# Altium PCB PCB1.PcbDoc
Units mm, origin at the board's own origin, x right, y up, seen from the top; angles counter-clockwise.
Board outline 55 x 45 mm, 2 copper layers (Top Layer, Bottom Layer); 64 components, 47 nets, 257 pads, 33 vias.
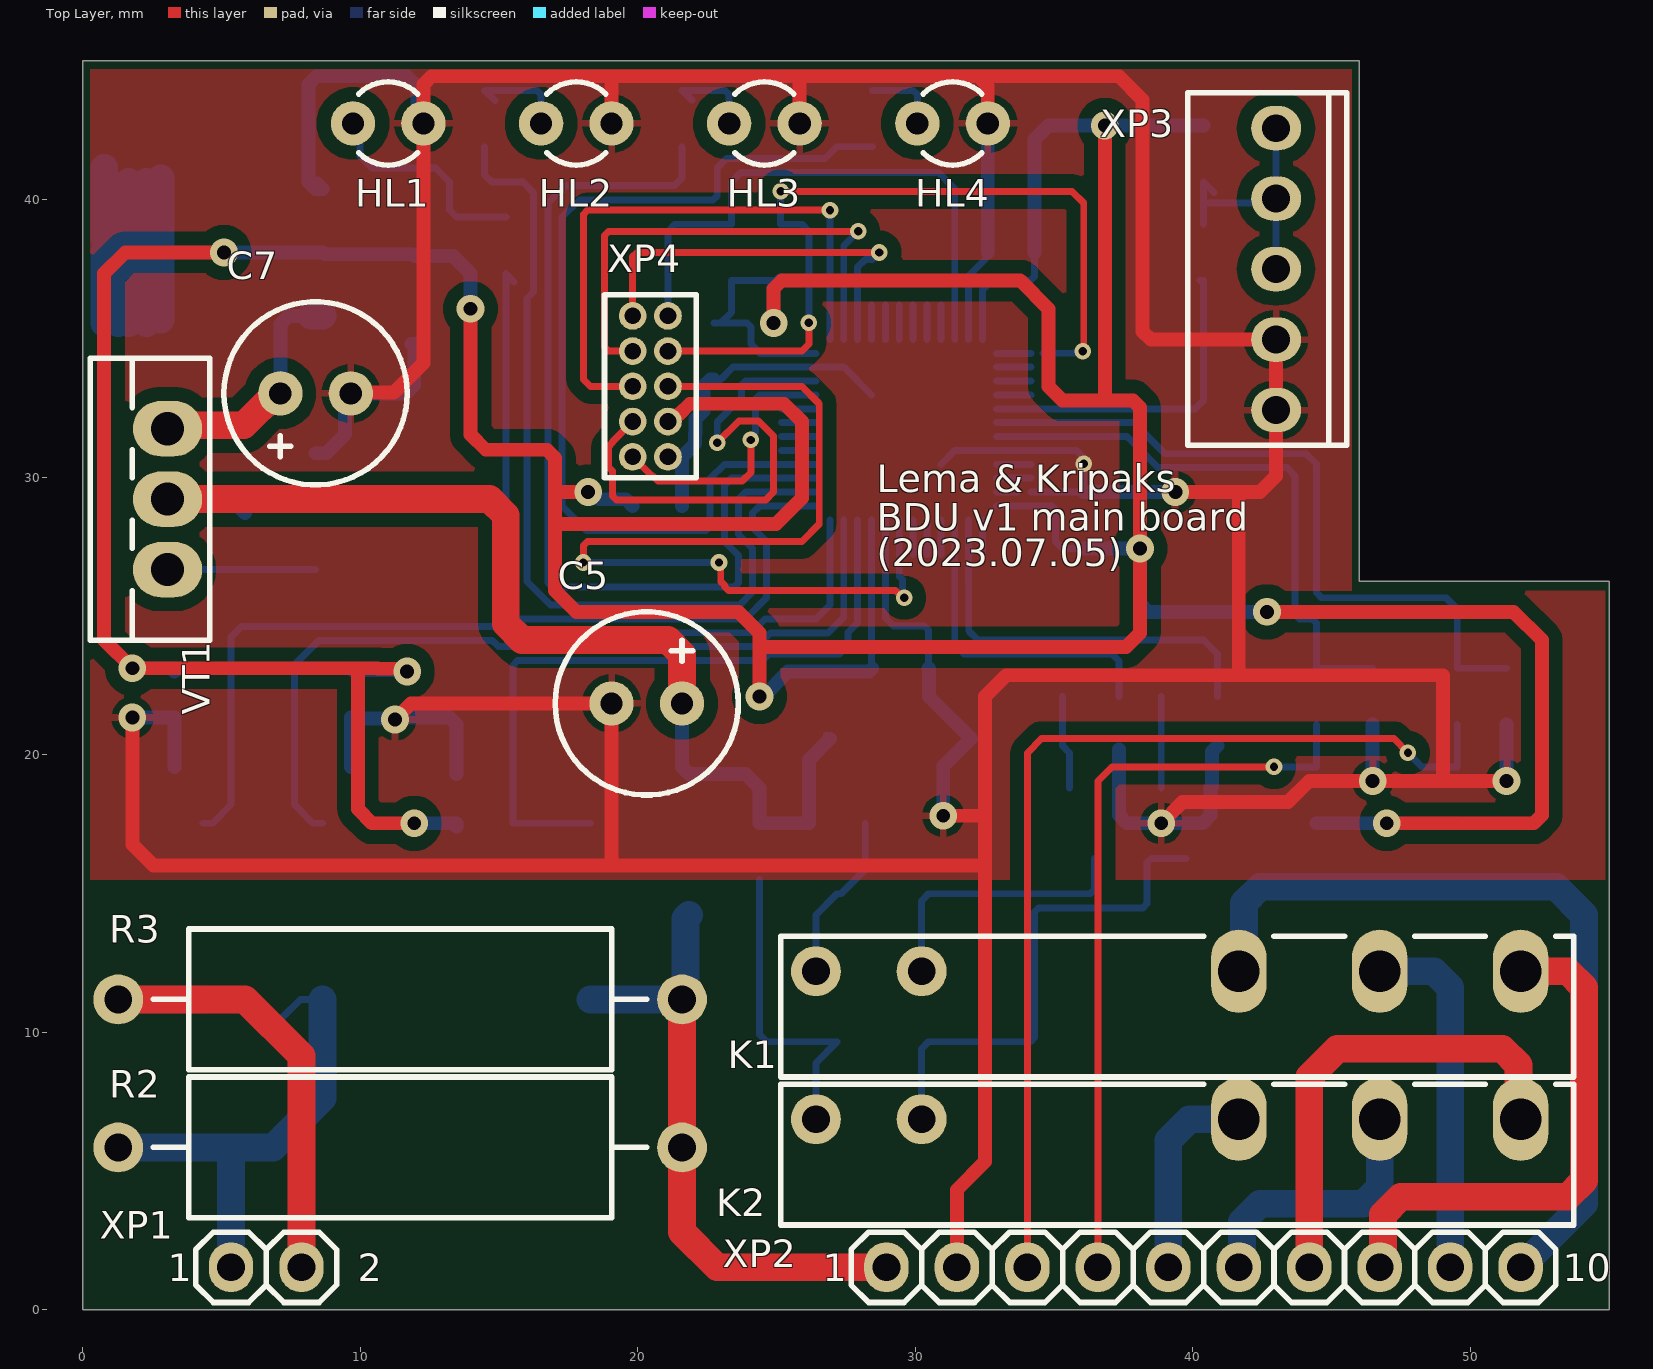
[diagram p0: Top Layer view]
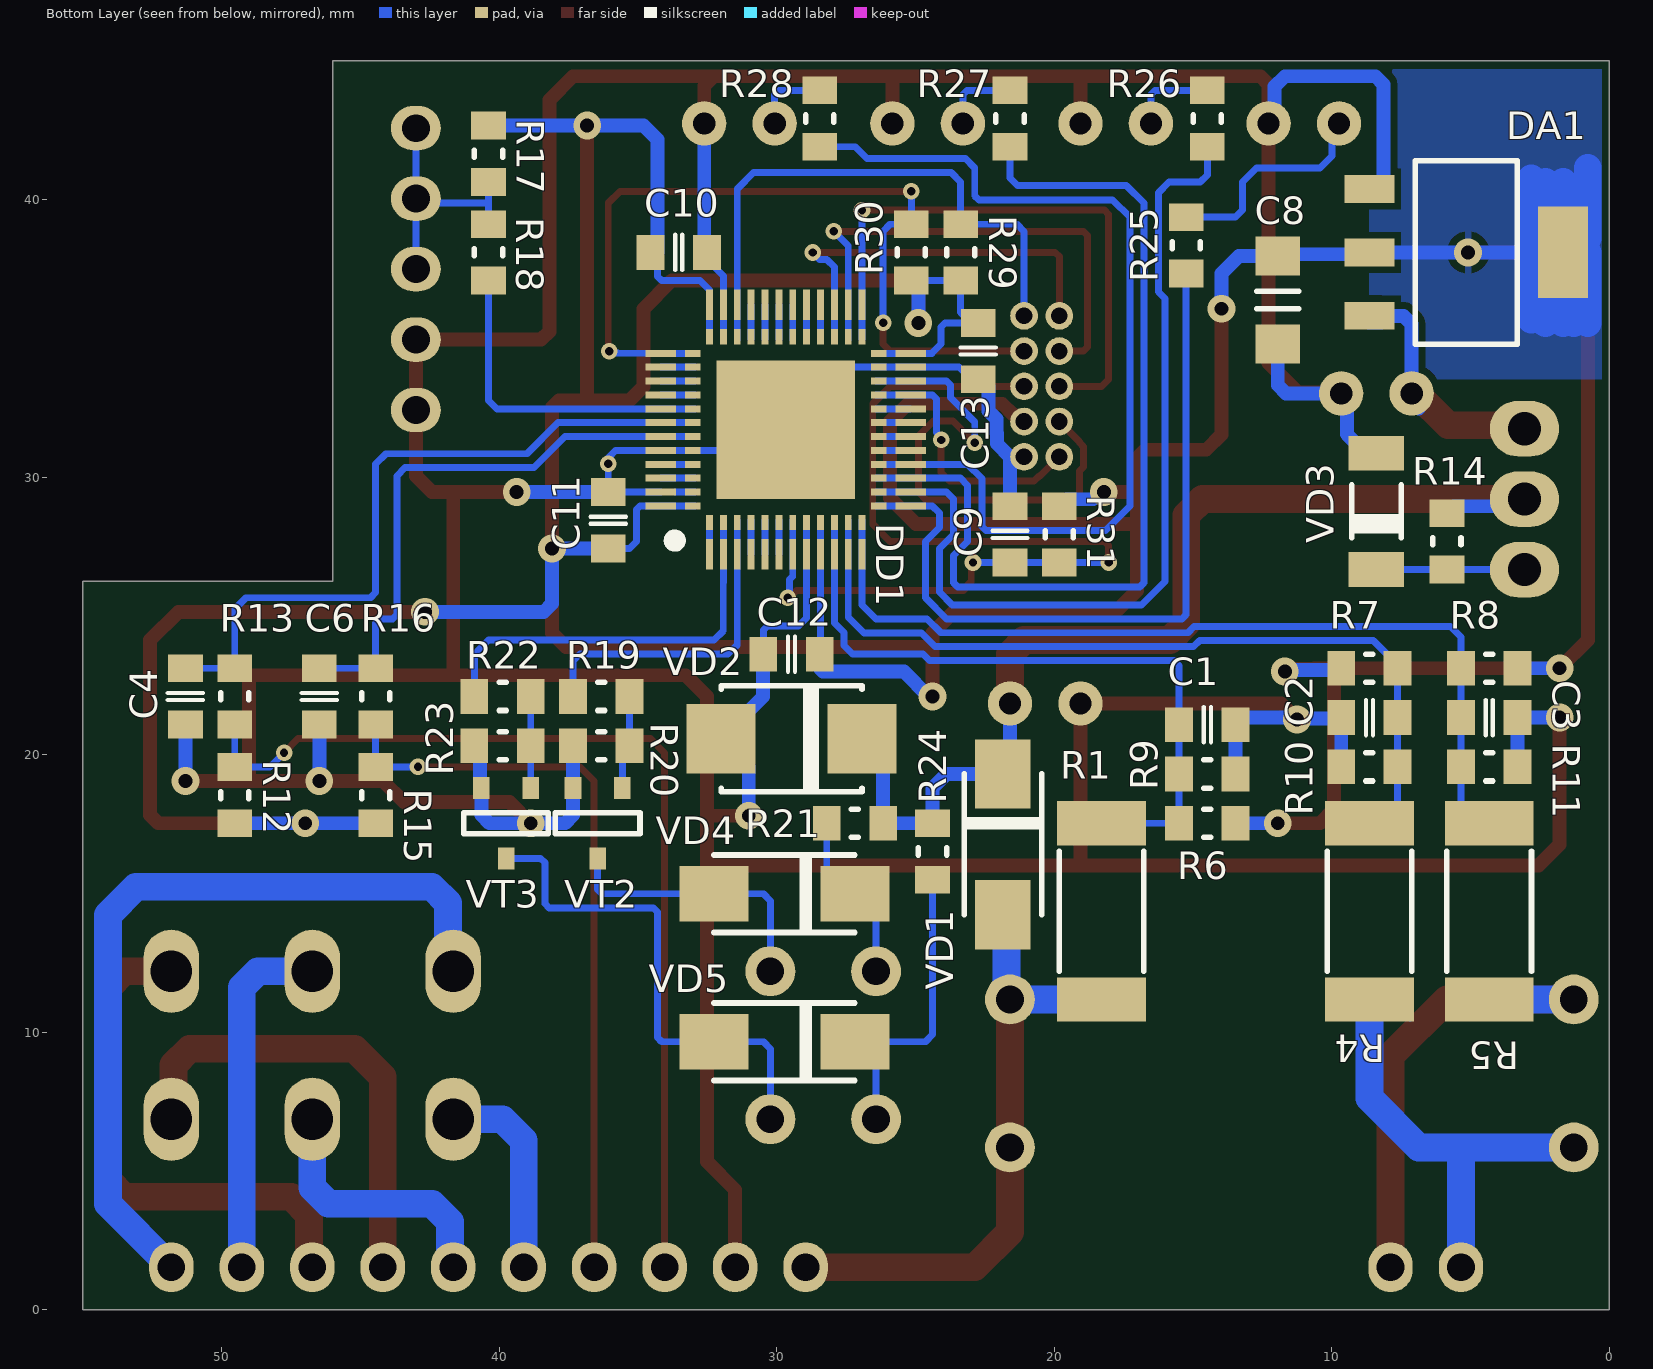
[diagram p1: Bottom Layer view, seen from below]

## Layer stack, top to bottom
Top Solder: solder mask 0.0102, Solder Resist, Dk 3.5
Top Layer: signal copper 0.0356
Dielectric 1: dielectric 0.32, FR-4, Dk 4.8
Bottom Layer: signal copper 0.0356
Bottom Solder: solder mask 0.0102, Solder Resist, Dk 3.5

## Board outline
0,0 0,45 46,45 46,26.25 55,26.25 55,0

## Design rules (kind name [scope] priority, off if disabled: settings)
Clearance Clearance_1 [All vs InNamedPolygon('GND_L01_P000')] p1: gap=0.5 ignorepadtopadclearanceinfootprint=FALSE
Clearance [All] p2: gap=0.25 ignorepadtopadclearanceinfootprint=FALSE
MinimumSolderMaskSliver [All] p1: minsoldermaskwidth=0.002
PolygonConnect [All] p1: connectstyle=Relief reliefconductorwidth=0.254 reliefentries=4 polygonreliefangle="90 Angle" airgapwidth=0.254
RoutingVias [All] p1: holewidth=0.711 width=1.27 viastyle="Through Hole" minholewidth=0.3 minwidth=0.6 maxholewidth=0.5 maxwidth=1
SilkToSilkClearance [All] p1: silktosilkclearance=0.002
SilkToSolderMaskClearance [IsPad] p1: minsilkscreentomaskgap=0.002 clearancetoexposedcopper=TRUE
SolderMaskExpansion [All] p1: expansion=0.102 istentingtop=FALSE
Width [All] p1: maxlimit=1 minlimit=0.25 preferedwidth=0.5 minimp=50.000000 maximp=50.000000 favimp=50.000000
27 further rules are at their usual default settings.

## Components (designator, comment, footprint, x,y, rotation, side; value= is the part's Value field where it differs from the comment)
C1 "33n" "Cap Ceramic 0805" 13.462,21.082 r0 bottom
C2 "33n" "Cap Ceramic 0805" 9.652,21.336 r180 bottom
C3 "33n" "Cap Ceramic 0805" 3.302,21.336 r0 bottom
C4 "33n" "Cap Ceramic 0805" 51.308,23.114 r270 bottom
C5 "47u" "Cap electro d6.3x2.54mm" 19.05,21.844 r0 top
C6 "33n" "Cap Ceramic 0805" 46.482,23.114 r270 bottom
C7 "220u" "Cap electro d6.3x2.54mm" 9.652,33.02 r180 top
C8 "10u" "Cap Ceramic 1206" 11.938,34.798 r90 bottom
C9 "100n" "Cap Ceramic 0805" 21.59,28.956 r270 bottom
C10 "100n" "Cap Ceramic 0805" 32.512,38.1 r0 bottom
C11 "100n" "Cap Ceramic 0805" 36.068,29.464 r270 bottom
C12 "100n" "Cap Ceramic 0805" 30.48,23.622 r180 bottom
C13 "1u" "Cap Ceramic 0805" 22.735,33.528 r90 bottom
DA1 "LM1117IMP-3.3" SOT-232 8.636,40.386 r270 bottom
DD1 "STM32F103CBT6" "TQFP48/QFN48 S0.5" 32.67,27.214 r90 bottom
HL1 "LED" "LED S2.54d3.0" 9.73,42.75 r0 top
HL2 "LED" "LED S2.54d3.0" 16.51,42.75 r0 top
HL3 "LED" "LED S2.54d3.0" 23.29,42.75 r0 top
HL4 "LED" "LED S2.54d3.0" 30.07,42.75 r0 top
K1 "HF41F/12-ZS" RM699V 21.336,2.032 r180 top
K2 "HF41F/12-ZS" RM699V 21.336,-3.302 r180 top
R1 "30k" "Resistor 2512" 18.288,11.176 r90 bottom
R2 "300R" "Resistor 2W d5.08x20.32 axial" 1.27,5.842 r0 top
R3 "300R" "Resistor 2W d5.08x20.32 axial" 1.27,11.176 r0 top
R4 "30k" "Resistor 2512" 8.636,11.176 r90 bottom
R5 "30k" "Resistor 2512" 4.318,11.176 r90 bottom
R6 "3k6" "Resistor 0805" 13.462,17.526 r0 bottom
R7 "3k6" "Resistor 0805" 9.652,23.114 r180 bottom
R8 "3k6" "Resistor 0805" 3.302,23.114 r0 bottom
R9 "3k6" "Resistor 0805" 13.462,19.304 r0 bottom
R10 "3k6" "Resistor 0805" 9.652,19.558 r180 bottom
R11 "3k6" "Resistor 0805" 3.302,19.558 r0 bottom
R12 "5k1" "Resistor 0805" 49.53,17.526 r90 bottom
R13 "51k" "Resistor 0805" 49.53,21.082 r90 bottom
R14 "10k" "Resistor 0805" 5.842,28.702 r270 bottom
R15 "5k1" "Resistor 0805" 44.45,17.526 r90 bottom
R16 "51k" "Resistor 0805" 44.45,21.082 r90 bottom
R17 "5k1" "Resistor 0805" 40.386,42.672 r270 bottom
R18 "51k" "Resistor 0805" 40.386,39.116 r270 bottom
R19 "1k" "Resistor 0805" 35.306,22.098 r0 bottom
R20 "10k" "Resistor 0805" 35.306,20.32 r0 bottom
R21 "200R" "Resistor 0805" 28.194,17.526 r180 bottom
R22 "1k" "Resistor 0805" 38.862,22.098 r0 bottom
R23 "10k" "Resistor 0805" 38.862,20.32 r0 bottom
R24 "200R" "Resistor 0805" 24.384,15.494 r90 bottom
R25 "1k" "Resistor 0805" 15.24,37.338 r90 bottom
R26 "1k" "Resistor 0805" 14.478,41.91 r90 bottom
R27 "1k" "Resistor 0805" 21.59,41.91 r90 bottom
R28 "1k" "Resistor 0805" 28.448,41.91 r90 bottom
R29 "10k" "Resistor 0805" 23.368,37.084 r90 bottom
R30 "10k" "Resistor 0805" 25.146,37.084 r90 bottom
R31 "10k" "Resistor 0805" 19.812,28.956 r270 bottom
VD1 "S1M" "DO-214AC SMA" 21.844,19.304 r270 bottom
VD2 "SMBJ43CA" "DO-214AA SMB" 26.924,20.574 r0 bottom
VD3 "BZV55C12" SOD80C 8.382,26.67 r90 bottom
VD4 "S1M" "DO-214AC SMA" 27.178,14.986 r0 bottom
VD5 "S1M" "DO-214AC SMA" 27.178,9.652 r0 bottom
VT1 "TIP112" TO-220 3.048,26.67 r90 top
VT2 "BC847" SOT-23-3 36.449,16.256 r0 bottom
VT3 "BC847" SOT-23-3 39.751,16.256 r0 bottom
XP1 "ZL211-02KG" "Pins 1x2" 5.334,1.524 r0 top
XP2 "ZL211-10KG" "Pins 1x10" 28.956,1.524 r0 top
XP3 "NS25-W5P" WF-05 43,42.58 r270 top
XP4 "Pins 2x5" "Pins 2x5 - 1.27" 21.082,29.464 r90 top

## Footprints (in the part's own frame and the unit in brackets; to place one, negate y for a bottom-side part, rotate by r counter-clockwise, add the part's x,y. Pads: shape width x height; smd on the part's side, far side on the other; paste and mask are expansions set on the pad)
"Cap Ceramic 0805" [mm]
  rect 1x1.25 smd: 1(0,0) 2(2.032,0)
  silkscreen extent 0.89,-0.64 1.14,0.64
"Cap Ceramic 1206" [mm]
  rect 1.4x1.6 smd: 1(0,0) 2(3.175,0)
  silkscreen extent 1.27,-0.76 1.91,0.76
"Cap electro d6.3x2.54mm" [mm]
  round 1.6 hole 0.8: 1(0,0) 2(2.54,0)
  silkscreen extent -2.03,-3.3 4.57,3.3
"DO-214AA SMB" [mm]
  rect 2.5x2.5 smd: 1(5.08,0) 2(0,0)
  silkscreen extent 0,-1.91 5.08,1.91
"DO-214AC SMA" [mm]
  rect 2.5x2 smd: 1(5.08,0) 2(0,0)
  silkscreen extent 0,-1.4 5.08,1.4
"LED S2.54d3.0" [mm]
  round 1.6 hole 0.8: 1(0,0) 2(2.54,0)
  silkscreen extent 0.21,-1.5 2.33,1.5
"Pins 1x2" [mm]
  oval 1.6x1.8 hole 1: 1(0,0) 2(2.54,0)
  silkscreen extent -1.27,-1.27 3.81,1.27
"Pins 1x10" [mm]
  oval 1.6x1.8 hole 1: 1(0,0) 2(2.54,0) 3(5.08,0) 4(7.62,0) 5(10.16,0) 6(12.7,0) 7(15.24,0) 8(17.78,0) 9(20.32,0) 10(22.86,0)
  silkscreen extent -1.27,-1.27 24.13,1.27
"Pins 2x5 - 1.27" [mm]
  round 1 hole 0.6: 1(1.27,0) 2(1.27,1.27) 3(2.54,0) 4(2.54,1.27) 5(3.81,0) 6(3.81,1.27) 7(5.08,0) 8(5.08,1.27) 9(6.35,0) 10(6.35,1.27)
  silkscreen extent 0.51,-1.02 7.11,2.29
"Resistor 2W d5.08x20.32 axial" [mm]
  round 1.8 hole 1: 1(0,0) 2(20.32,0)
  silkscreen extent 1.27,-2.54 19.05,2.54
"Resistor 0805" [mm]
  rect 1x1.25 smd: 1(0,0) 2(2.032,0)
  silkscreen extent 0.89,-0.51 1.14,0.51
"Resistor 2512" [mm]
  rect 1.6x3.2 smd: 1(0,0) 2(6.35,0)
  silkscreen extent 1.02,-1.52 5.33,1.52
RM699V [mm]
  round 1.8 hole 1: 1(-5.08,-10.16) 2(-8.89,-10.16)
  oval 2x3 hole 1.5: 11(-25.4,-10.16) 12(-20.32,-10.16) 14(-30.48,-10.16)
  silkscreen extent -32.38,-11.43 -3.81,-6.35
SOD80C [mm]
  rect 1.25x2 smd: 1(4.191,0) 2(0,0)
  silkscreen extent 1.14,-0.89 3.05,0.89
SOT-23-3 [mm]
  rect 0.6x0.8 smd: 1(-0.889,-2.54) 2(0.889,-2.54) 3(0,0)
  silkscreen extent -1.52,-1.65 1.52,-0.89
SOT-232 [mm]
  rect 1x1.8 smd: 1(0,0) 2(2.286,0) 3(4.572,0)
  rect 3.3x1.8 smd: 2(2.286,6.985)
  silkscreen extent -1.02,1.65 5.59,5.33
TO-220 [mm]
  oval 2x2.5 hole 1.2: 1(0,0) 2(2.54,0) 3(5.08,0)
  silkscreen extent -2.54,-1.52 7.62,2.79
"TQFP48/QFN48 S0.5" [mm]
  rect 1.1x0.25 smd: 1(0,-0.25) 2(0,-0.75) 3(0,-1.25) 4(0,-1.75) 5(0,-2.25) 6(0,-2.75) 7(0,-3.25) 8(0,-3.75) 9(0,-4.25) 10(0,-4.75) 11(0,-5.25) 12(0,-5.75) 25(9,-5.75) 26(9,-5.25) 27(9,-4.75) 28(9,-4.25) 29(9,-3.75) 30(9,-3.25) 31(9,-2.75) 32(9,-2.25) 33(9,-1.75) 34(9,-1.25) 35(9,-0.75) 36(9,-0.25)
  rect 0.55x0.25 smd: 1(1.15,-0.25) 2(1.15,-0.75) 3(1.15,-1.25) 4(1.15,-1.75) 5(1.15,-2.25) 6(1.15,-2.75) 7(1.15,-3.25) 8(1.15,-3.75) 9(1.15,-4.25) 10(1.15,-4.75) 11(1.15,-5.25) 12(1.15,-5.75) 25(7.85,-5.75) 26(7.85,-5.25) 27(7.85,-4.75) 28(7.85,-4.25) 29(7.85,-3.75) 30(7.85,-3.25) 31(7.85,-2.75) 32(7.85,-2.25) 33(7.85,-1.75) 34(7.85,-1.25) 35(7.85,-0.75) 36(7.85,-0.25)
  rect 0.25x1.1 smd: 13(1.75,-7.5) 14(2.25,-7.5) 15(2.75,-7.5) 16(3.25,-7.5) 17(3.75,-7.5) 18(4.25,-7.5) 19(4.75,-7.5) 20(5.25,-7.5) 21(5.75,-7.5) 22(6.25,-7.5) 23(6.75,-7.5) 24(7.25,-7.5) 37(7.25,1.5) 38(6.75,1.5) 39(6.25,1.5) 40(5.75,1.5) 41(5.25,1.5) 42(4.75,1.5) 43(4.25,1.5) 44(3.75,1.5) 45(3.25,1.5) 46(2.75,1.5) 47(2.25,1.5) 48(1.75,1.5)
  rect 0.25x0.55 smd: 13(1.75,-6.35) 14(2.25,-6.35) 15(2.75,-6.35) 16(3.25,-6.35) 17(3.75,-6.35) 18(4.25,-6.35) 19(4.75,-6.35) 20(5.25,-6.35) 21(5.75,-6.35) 22(6.25,-6.35) 23(6.75,-6.35) 24(7.25,-6.35) 37(7.25,0.35) 38(6.75,0.35) 39(6.25,0.35) 40(5.75,0.35) 41(5.25,0.35) 42(4.75,0.35) 43(4.25,0.35) 44(3.75,0.35) 45(3.25,0.35) 46(2.75,0.35) 47(2.25,0.35) 48(1.75,0.35)
  rect 2x2 smd: 23(3.25,-4.25) 23(3.25,-1.75) 23(5.75,-4.25) 23(5.75,-1.75)
  rect 5x5 smd paste-100: 23(4.5,-3)
  Top Layer lines w0.25: 1.75,-7.5 1.75,-6.35 1.75,-6.25 ; 2.25,-7.5 2.25,-6.35 2.25,-6.25 ; 2.75,-7.5 2.75,-6.35 2.75,-6.25 ; 3.25,-7.5 3.25,-6.35 3.25,-6.25 ; 3.75,-7.5 3.75,-6.25 ; 4.25,-7.5 4.25,-6.25 ; 4.75,-7.5 4.75,-6.25 ; 5.25,-7.5 5.25,-6.25 ; 5.75,-7.5 5.75,-6.35 5.75,-6.25 ; 6.25,-7.5 6.25,-6.35 6.25,-6.25 ; 6.75,-7.5 6.75,-6.35 6.75,-6.25 ; 7.25,-7.5 7.25,-6.35 7.25,-6.25 ; 0,-5.75 1.15,-5.75 1.25,-5.75 ; 7.75,-5.75 7.85,-5.75 9,-5.75 ; 0,-5.25 1.15,-5.25 1.25,-5.25 ; 7.75,-5.25 7.85,-5.25 9,-5.25 ; 0,-4.75 1.15,-4.75 1.25,-4.75 ; 7.75,-4.75 7.85,-4.75 9,-4.75 ; 0,-4.25 1.15,-4.25 1.25,-4.25 ; 7.75,-4.25 9,-4.25 ; 0,-3.75 1.15,-3.75 1.25,-3.75 ; 7.75,-3.75 9,-3.75 ; 0,-3.25 1.15,-3.25 1.25,-3.25 ; 7.75,-3.25 9,-3.25 ; 0,-2.75 1.25,-2.75 ; 7.75,-2.75 9,-2.75 ; 0,-2.25 1.25,-2.25 ; 7.75,-2.25 9,-2.25 ; 0,-1.75 1.25,-1.75 ; 7.75,-1.75 9,-1.75 ; 0,-1.25 1.15,-1.25 1.25,-1.25 ; 7.75,-1.25 7.85,-1.25 9,-1.25 ; 0,-0.75 1.15,-0.75 1.25,-0.75 ; 7.75,-0.75 7.85,-0.75 9,-0.75 ; 0,-0.25 1.25,-0.25 ; 7.75,-0.25 7.85,-0.25 9,-0.25 ; 1.75,0.25 1.75,0.35 1.75,1.5 ; 2.25,0.25 2.25,0.35 2.25,1 ; 2.75,0.25 2.75,1.5 ; 3.25,0.25 3.25,1.5 ; 3.75,0.25 3.75,0.35 3.75,1.5 ; 4.25,0.25 4.25,0.35 4.25,1.5 ; 4.75,0.25 4.75,0.35 4.75,1.5 ; 5.25,0.25 5.25,1.5 ; 5.75,0.25 5.75,1.5 ; 6.25,0.25 6.25,1.5 ; 6.75,0.25 6.75,1.5 ; 7.25,0.25 7.25,0.35 7.25,1.5 ; 2.25,1 2.25,1
  silkscreen extent 0.2,0.7 0.8,1.3
WF-05 [mm]
  oval 1.6x1.8 hole 1: 1(0,0) 2(2.54,0) 3(5.08,0) 4(7.62,0) 5(10.16,0)
  silkscreen extent -1.27,-3.18 11.43,2.54

## Part data
C1 C2 C3 C4 C6 C8 C9 C10 C11 C12 C13: library part CerCap
  C8: Comments=10V
C5 C7: library part ECap
  C5: Comments=50V
  C7: Comments=16V
DA1: library part LM1117IMP-x.x
DD1: library part STM32F100C4T6
K1 K2: library part RM699V-xx11-85-xxxx
R1 R4 R5: library part "Resistor 1W", Comments=1%
R2 R3: library part "Resistor 2W", Comments=1%
R6 R7 R8 R9 R10 R11 R12 R13 R14 R15 R16 R17 R18 R19 R20 R21 R22 R23 R24 R25 R26 R27 R28 R29 R30 R31: library part "Resistor 0,125W"
  R6 R7 R8 R9 R10 R11: Comments=1%
  R12 R13 R14 R15 R16 R17 R18 R19 R20 R21 R22 R23 R24 R25 R26 R27 R28 R29 R30 R31: Comments=5%
VD2: library part SMBJxxCA
VD3: library part BZV55Cxx
VT1: library part BDW93C
XP1: library part "Pins 1x2", Name=IA, Name1=CH1, Name2=CH2
XP2: library part "Pins 1x10", Name1=18V, Name2=COM, Name3=LATCH2, Name4=LATCH1, Name5=NC2, Name6=COM2, Name7=NO2, Name8=NO1, Name9=COM1, Name10=NC2
XP3: library part "Pins 1x5", Name=Цепь, Name1=GND, Name2=GND, Name3=SWITCH, Name4=SWITCH, Name5=SWITCH
XP4: Name=PROG

## Via types
v1: diameter 1, hole 0.5, Top Layer to Bottom Layer, tented both sides, 19 vias
v2: diameter 0.6, hole 0.3, Top Layer to Bottom Layer, tented both sides, 14 vias

## Nets (pads, with @x,y where several pads share a name; then routed paths per layer and width w, separated by ;. In a path a pad name is that pad's centre, name@x,y a point inside that pad or via, vN(x,y) a via of type N, cw(c..) or ccw(c..) an arc to the next point about the centre after c; other vN are vias at no path point)
3V3: C8.2 C10.2 C11.2 C12.2 C13.2 DA1.2 DD1.9 DD1.24 DD1.36 DD1.48 R6.1 R7.1 R8.1 R12.1 R15.1 R17.1 R29.1 R30.1 R31.1 XP4.3 | length 241.7
  Top Layer w0.5: v1(5.08,38.1) 1.524,38.1 0.762,37.338 0.762,24.13 v1(1.778,23.114) 9.906,23.114 ; v1(11.684,22.999) 11.588,23.095 10.632,23.095 10.613,23.114 9.906,23.114 ; v1(11.938,17.526) 10.414,17.526 9.906,18.034 9.906,23.114 ; v1(13.97,36.068) 13.97,31.535 14.517,30.988 16.725,30.988 17.018,30.695 17.018,29.464 ; 17.311,28.313 24.972,28.313 25.908,29.249 25.908,32.004 25.265,32.647 21.869,32.647 21.496,32.274 21.487,32.274 21.217,32.004 XP4.3 ; v1(18.207,29.464) 17.018,29.464 ; v1(24.384,22.098) 24.384,23.876 ; v1(24.892,35.56) 24.892,36.791 25.185,37.084 33.782,37.084 34.798,36.068 34.798,33.274 35.306,32.766 36.83,32.766 ; v1(36.83,42.672) 36.83,32.766 ; v1(42.672,25.146) 51.562,25.146 52.578,24.13 52.578,17.819 52.285,17.526 v1(46.99,17.526) ; 17.018,29.464 17.018,25.908 17.78,25.146 23.622,25.146 24.384,24.384 24.384,23.876 ; 24.384,23.876 37.592,23.876 38.1,24.384 v1(38.1,27.432) 38.1,32.512 37.846,32.766 36.83,32.766
  Bottom Layer w0.25: C13.2 C13.2@22.86,35.56 ; 24.408,34.464 DD1.24@25.17,34.464 ; 24.408,34.468 24.404,34.468 24.074,34.798 24.074,35.411 23.925,35.56 22.985,35.56 23.368,35.943 R29.1 25.142,37.084 R30.1 ; C12.2@28.42,23.142 DD1.9@28.42,27.214 ; DD1.36@32.424,36.322 32.424,36.742 32.766,37.084 34.141,37.084 34.29,37.233 C10.2@34.29,38.1 ; DD1.48@34.17,28.964 34.932,28.964 ; 34.932,28.96 35.052,28.84 35.052,27.686 35.306,27.432 C11.2
  Bottom Layer w0.5: DA1.2@1.651,38.1 v1(5.08,38.1) 8.636,38.1 8.7,38.036 11.874,38.036 C8.2 13.335,37.973 13.97,37.338 v1(13.97,36.068) ; v1(1.778,23.114) R8.1 R8.1@3.302,22.989 ; R7.1 9.71,23.056 11.626,23.056 v1(11.684,22.999) ; v1(11.938,17.526) R6.1 R6.1@13.462,17.401 ; v1(18.207,29.464) 18.342,29.464 18.6,29.206 19.562,29.206 R31.1 ; v1(24.384,22.098) 24.519,22.098 25.412,22.991 27.905,22.991 27.907,22.993 28.327,22.993 C12.2@28.448,23.114 ; v1(24.892,35.56) 24.892,36.834 R30.1@25.142,37.084 ; C10.2@34.29,38.1 34.29,42.164 34.798,42.672 v1(36.83,42.672) R17.1 ; C11.2 v1(38.1,27.432) 38.1,25.439 38.393,25.146 v1(42.672,25.146) ; R15.1 v1(46.99,17.526) R12.1
  Bottom Layer w1: 0.762,35.56 DA1.2@0.762,38.1 ; DA1.2@0.762,38.608 0.762,41.148 ; 1.27,35.56 DA1.2@1.27,38.1 ; 1.651,35.56 1.651,38.1 1.651,40.64 ; 2.286,35.56 2.286,38.1 2.286,40.64 ; 2.805,35.687 2.805,38.227 2.805,40.767
12V: C7.2 DA1.3 VT1.3 | length 9.6
  Top Layer w1: VT1.3 3.166,31.868 5.798,31.868 6.95,33.02 C7.2
  Bottom Layer w0.5: C7.2@6.858,32.468 7.112,32.722 C7.2 7.112,35.521 7.405,35.814 DA1.3@8.236,35.814
  Bottom Layer w1: VT1.3 VT1.3@3.166,31.868 ; DA1.3@8.236,35.814 DA1.3
C_K1: K1.11 XP2.9 | length 12.9
  Bottom Layer w1: K1.11 48.69,12.192 49.276,11.606 XP2.9
C_K2: K2.11 XP2.6 | length 9.7
  Bottom Layer w0.25: XP2.6 XP2.6@41.729,1.524
  Bottom Layer w1: XP2.6 41.771,1.639 41.771,3.163 42.418,3.81 46.15,3.81 46.736,4.396 K2.11
CH1_ADC_MCU: C2.2 DD1.11 R4.2 R7.2 R10.2 | length 29.3
  Bottom Layer w0.25: R4.2 8.293,17.526 7.62,18.199 R10.2 C2.2 7.62,23.239 8.497,24.116 14.751,24.116 14.975,23.892 24.29,23.892 24.782,24.384 26.848,24.384 27.42,24.956 DD1.11@27.42,27.214
CH2_ADC_MCU: C3.2 DD1.12 R5.2 R8.2 R11.2 | length 31.3
  Bottom Layer w0.25: R5.2 4.661,17.526 5.334,18.199 R11.2 C3.2 R8.2@5.334,22.989 ; R8.2 5.334,24.235 5.719,24.62 10.517,24.62 10.521,24.616 14.958,24.616 15.182,24.392 24.083,24.392 24.583,24.892 26.416,24.892 26.92,25.396 DD1.12@26.92,27.214
Gnd: C1.1 C2.1 C3.1 C4.2 C5.1 C6.2 C7.1 C8.1 C9.1 C10.1 C11.1 C12.1 C13.1 DA1.1 DD1.8 DD1.23 DD1.35 DD1.44 DD1.47 HL1.2 HL2.2 HL3.2 HL4.2 R9.1 R10.1 R11.1 R20.2 R23.2 VD2.1 VD3.1 VT2.2 VT3.2 XP2.2 XP3.4 XP3.5 XP4.1 | length 259.1
  Top Layer w0.5: v1(1.778,21.336) 1.778,16.764 2.54,16.002 19.05,16.002 ; C7.1 9.678,33.046 11.202,33.046 12.27,34.114 HL1.2 12.27,44.157 12.563,44.45 19.05,44.45 ; v1(11.248,21.264) 11.828,21.844 C5.1 19.05,16.002 ; HL2.2 19.05,44.45 ; HL3.2 25.83,44.274 25.654,44.45 ; v1(31.004,17.796) 32.496,17.796 32.512,17.78 ; XP2.2 31.496,4.318 32.512,5.334 32.512,16.002 ; HL4.2 32.61,44.098 32.258,44.45 ; v1(38.862,17.526) 39.624,18.288 43.434,18.288 44.196,19.05 v1(46.482,19.05) 49.022,19.05 ; v1(39.37,29.464) 41.656,29.464 ; v1(51.308,19.05) 49.022,19.05 ; 19.05,16.002 32.512,16.002 ; 19.05,44.45 25.654,44.45 ; 25.654,44.45 32.258,44.45 ; 32.258,44.45 37.338,44.45 38.192,43.596 38.192,35.253 38.485,34.96 XP3.4 XP3.5 43,30.046 42.418,29.464 41.656,29.464 ; 32.512,16.002 32.512,17.78 ; 32.512,17.78 32.512,22.098 33.274,22.86 41.656,22.86 ; 41.656,22.86 41.656,29.464 ; 41.656,22.86 49.022,22.86 49.022,19.05
  Bottom Layer w0.25: C13.1@22.985,33.528 23.421,33.964 DD1.23@25.17,33.964 ; DD1.23@26.32,33.964 26.42,33.964 27.42,33.964 DD1.23@28.42,32.964 ; 28.92,25.944 DD1.8@28.92,27.214 ; 28.924,25.944 28.924,24.924 29.21,24.638 30.331,24.638 30.48,24.489 C12.1@30.48,23.114 ; DD1.23@30.92,30.464 31.42,30.964 DD1.44@32.92,30.964 ; DD1.35@31.92,36.214 31.92,37.254 C10.1@32.512,37.846 ; DD1.47@34.17,29.464 C11.1 v2(36.068,30.48) 36.068,30.698 35.802,30.964 DD1.44@34.17,30.964
  Bottom Layer w0.5: v1(1.778,21.336) C3.1 R11.1 ; VD3.1 8.757,30.861 9.442,31.546 9.442,32.81 C7.1 11.645,33.02 11.938,33.313 C8.1 C8.1@11.838,34.798 ; DA1.1@8.43,40.592 DA1.1 8.378,40.386 8.128,40.636 8.128,44.157 8.421,44.45 11.684,44.45 12.06,44.074 12.06,42.96 HL1.2 ; R10.1 C2.1 9.688,21.3 11.212,21.3 v1(11.248,21.264) ; v1@11.176,21.336 13.212,21.336 13.462,21.086 C1.1 R9.1 ; C5.1@19.036,21.858 C5.1 ; XP4.1 21.59,30.734 ; C9.1 21.59,30.734 ; C13.1 22.61,33.528 22.36,33.278 22.36,32.382 22.082,32.104 22.082,31.595 22.06,31.573 22.06,31.204 21.59,30.734 ; C12.1@30.48,23.114 30.492,23.102 30.492,22.086 VD2.1 31.004,19.574 v1(31.004,17.796) ; C10.1@32.61,38.1 HL4.2 ; C11.1 v1(39.37,29.464) ; R20.2@37.338,20.195 VT2.2 37.338,17.819 37.631,17.526 v1(38.862,17.526) 40.347,17.526 40.64,17.819 VT3.2 40.69,18.846 40.69,20.116 R23.2 ; v1(46.482,19.05) C6.2 ; v1(51.308,19.05) C4.2
GPIO_PB12: DD1.25 XP4.6 | length 20.2
  Top Layer w0.25: XP4.6 18.288,33.274 18.034,33.528 18.034,39.475 18.183,39.624 v2(26.924,39.624)
  Bottom Layer w0.25: DD1.25@26.92,36.214 v2@26.92,39.624
GPIO_PB13: DD1.26 XP4.8 | length 17.2
  Top Layer w0.25: XP4.8 18.945,34.544 18.796,34.693 18.796,38.713 18.945,38.862 v2(27.94,38.862)
  Bottom Layer w0.25: DD1.26@27.42,36.214 27.42,38.342 v2(27.94,38.862)
GPIO_PB14: DD1.27 XP4.10 | length 13.4
  Top Layer w0.25: XP4.10 19.812,37.951 19.961,38.1 v2(28.702,38.1)
  Bottom Layer w0.25: DD1.27@27.92,36.214 27.92,37.572 28.194,37.846 28.448,37.846 v2(28.702,38.1)
K1_MCU: DD1.3 R19.2 | length 10.7
  Bottom Layer w0.25: DD1.3@31.42,27.214 31.42,23.952 31.75,23.622 37.084,23.622 37.338,23.368 R19.2
K2_MCU: DD1.2 R22.2 | length 13.6
  Bottom Layer w0.25: 31.92,26.198 DD1.2@31.92,27.214 ; 31.924,26.198 31.924,24.464 32.258,24.13 40.386,24.13 40.894,23.622 R22.2
KIP1: R15.2 R16.1 XP2.4 | length 27.1
  Top Layer w0.25: XP2.4 36.576,19.05 37.084,19.558 v2(42.926,19.558)
  Bottom Layer w0.25: v2(42.926,19.558) R15.2 R16.1
KIP1_DI_MCU: C6.1 DD1.43 R16.2 | length 19.7
  Bottom Layer w0.25: DD1.43@34.17,31.464 37.624,31.464 38.747,30.341 43.391,30.341 43.688,30.044 43.688,25.041 43.837,24.892 44.301,24.892 44.45,24.743 R16.2 C6.1
KIP2: R12.2 R13.1 XP2.3 | length 36.2
  Top Layer w0.25: XP2.3 34.036,20.066 34.544,20.574 47.244,20.574 v2(47.752,20.066)
  Bottom Layer w0.25: v2(47.752,20.066) 48.26,19.558 R12.2 R13.1
KIP2_DI_MCU: C4.1 DD1.42 R13.2 | length 24.8
  Bottom Layer w0.25: DD1.42@34.17,31.964 37.886,31.964 39.005,30.845 44.085,30.845 44.45,30.48 44.45,25.843 44.639,25.654 49.127,25.654 49.53,25.251 R13.2 C4.1
LED1: DD1.13 R25.1 | length 26.9
  Bottom Layer w0.25: R25.1@15.538,37.04 R25.1 15.24,25.041 15.389,24.892 23.876,24.892 24.638,25.654 24.638,27.686 24.13,28.194 24.13,28.702 24.392,28.964 DD1.13@25.17,28.964
LED2: DD1.14 R26.1 | length 31
  Bottom Layer w0.25: R26.1 14.478,40.894 14.732,40.64 15.853,40.64 16.242,40.251 16.242,36.682 16.002,36.442 16.002,26.245 16.847,25.4 23.671,25.4 24.13,25.859 24.13,27.432 23.622,27.94 23.622,29.21 23.876,29.464 24.384,29.464 DD1.14@25.17,29.464
LED3: DD1.15 R27.1 | length 32.9
  Bottom Layer w0.25: R27.1 21.59,40.789 21.314,40.513 17.399,40.513 16.764,39.878 16.764,26.196 16.913,26.047 23.473,26.047 23.622,26.196 23.622,27.178 23.114,27.686 23.114,29.706 23.372,29.964 24.465,29.964 24.672,29.964 DD1.15@25.17,29.964
LED4: DD1.16 R28.1 | length 33.5
  Bottom Layer w0.25: DD1.16@25.17,30.464 23.114,30.464 22.606,29.956 22.606,28.228 22.457,28.079 18.149,28.079 17.272,28.956 17.272,39.37 17.895,39.993 22.711,39.993 22.86,40.142 22.86,41.148 23.194,41.482 26.75,41.482 27.178,41.91 R28.1
NC_K1: K1.12 XP2.10 | length 29.1
  Bottom Layer w1: K1.12 41.847,12.383 41.847,14.654 42.433,15.24 53.086,15.24 54.102,14.224 54.102,3.81 XP2.10
NC_K2: K2.12 XP2.5 | length 7.9
  Bottom Layer w0.25: K2.12@41.656,6.358 K2.12
  Bottom Layer w1: XP2.5 39.116,6.096 39.878,6.858 K2.12
NetHL1_1: HL1.1 R25.2 | length 8
  Bottom Layer w0.25: HL1.1 9.988,42.492 9.988,41.574 10.414,41.148 12.7,41.148 13.208,40.64 13.208,39.624 13.462,39.37 R25.2
NetHL2_1: HL2.1 R26.2 | length 3.7
  Bottom Layer w0.25: R26.2@14.851,43.569 R26.2 16.361,43.942 16.51,43.793 HL2.1 HL2.1@16.478,42.75
NetHL3_1: HL3.1 R27.2 | length 3.3
  Bottom Layer w0.25: R27.2@21.947,43.585 R27.2 23.141,43.942 23.29,43.793 HL3.1
NetHL4_1: HL4.1 R28.2 | length 3
  Bottom Layer w0.25: R28.2 29.921,43.942 30.07,43.793 HL4.1 HL4.1@29.765,42.75
NetK1_1: K1.1 R21.1 VD4.2 | length 6.2
  Bottom Layer w0.25: K1.1 26.416,14.224 VD4.2 27.321,14.986 28.194,15.859 R21.1
NetK1_2: K1.2 VD4.1 VT2.3 | length 10.1
  Bottom Layer w0.25: K1.2 30.226,14.732 30.48,14.986 VD4.1 36.3,14.986 36.449,15.135 VT2.3
NetK2_1: K2.1 R24.1 VD5.2 | length 11.6
  Bottom Layer w0.25: R24.1 24.384,9.906 24.638,9.652 VD5.2 26.416,8.89 K2.1
NetK2_2: K2.2 VD5.1 VT3.3 | length 18.4
  Bottom Layer w0.25: K2.2 30.226,9.398 30.48,9.652 VD5.1 34.141,9.652 34.29,9.801 34.29,14.329 34.439,14.478 38.205,14.478 38.354,14.627 38.354,16.107 38.503,16.256 VT3.3
NetR2_1: R2.1 R4.1 XP1.1 | length 17.9
  Bottom Layer w0.25: R2.1@1.27,5.765 R2.1 ; 5.185,5.842 5.26,5.768 5.334,5.693 ; R4.1@7.163,10.503 7.836,11.176 R4.1
  Bottom Layer w1: R2.1 5.185,5.842 6.858,5.842 8.636,7.62 R4.1 ; XP1.1 5.334,5.693
NetR3_1: R3.1 R5.1 XP1.2 | length 18.2
  Top Layer w1: R3.1 5.842,11.176 7.874,9.144 XP1.2
  Bottom Layer w0.25: R5.1 R5.1@4.371,11.123
  Bottom Layer w1: R3.1 R5.1
NetR14_2: R14.2 VD3.2 VT1.1 | length 5.3
  Bottom Layer w0.25: VT1.1 R14.2 VD3.2
NetR17_2: R17.2 R18.1 XP3.1 XP3.2 XP3.3 | length 10.3
  Bottom Layer w0.25: R18.1 40.386,39.878 ; R17.2@40.759,40.267 R17.2 40.386,39.878 ; XP3.1@42.742,42.322 XP3.1 XP3.2 ; XP3.3@42.9,37.5 XP3.3 XP3.2 ; 40.386,39.878 42.838,39.878 XP3.2
NetR19_1: R19.1 R20.1 VT2.1 | length 3.4
  Bottom Layer w0.25: R19.1 R20.1 35.56,20.066 VT2.1
NetR22_1: R22.1 R23.1 VT3.1 | length 3.3
  Bottom Layer w0.25: VT3.1 R23.1 R22.1
NO_K1: K1.14 XP2.8 | length 19.2
  Top Layer w1: XP2.8 46.851,1.639 46.851,3.417 47.498,4.064 53.516,4.064 54.102,4.65 54.102,11.606 53.516,12.192 K1.14
NO_K2: K2.14 XP2.7 | length 17.1
  Top Layer w1: XP2.7 44.196,8.382 45.212,9.398 51.149,9.398 51.735,8.812 51.735,6.939 K2.14
  Bottom Layer w0.25: XP2.7 XP2.7@44.196,1.624
RST: C9.2 DD1.7 R31.2 XP4.5 | length 33.6
  Top Layer w0.25: v2(18.034,26.924) 18.034,27.537 18.183,27.686 25.908,27.686 26.535,28.313 26.535,32.647 25.908,33.274 XP4.5 ; v2(22.92,26.922) 22.986,26.856 22.986,26.246 23.116,26.116 23.116,26.057 23.265,25.908 29.279,25.908 29.533,25.654 v2(29.601,25.654)
  Bottom Layer w0.25: v2(18.034,26.924) C9.2 21.592,26.922 v2(22.92,26.922) ; 29.42,26.416 DD1.7@29.42,27.214 ; 29.424,26.416 29.535,26.305 29.535,25.72 v2(29.601,25.654)
SW_DI_MCU: DD1.41 R18.2 | length 10.8
  Bottom Layer w0.25: DD1.41@34.17,32.464 40.084,32.464 40.386,32.766 R18.2 R18.2@40.261,37.084
SWCLK: DD1.37 R30.2 XP4.7 | length 29.5
  Top Layer w0.25: XP4.7 25.908,34.544 26.162,34.798 v2(26.162,35.56) ; v2(25.146,40.301) 35.645,40.301 36.068,39.878 36.068,34.582 v2(36.03,34.544)
  Bottom Layer w0.25: v2(25.146,40.301) R30.2 25.908,39.116 26.162,38.862 v2(26.162,35.56) ; DD1.37@34.593,34.466 35.709,34.466 35.72,34.477 35.963,34.477 v2(36.03,34.544)
SWDIO: DD1.34 R29.2 XP4.9 | length 19.6
  Bottom Layer w0.25: XP4.9 21.082,38.862 21.336,39.116 R29.2 23.368,40.64 23.706,40.978 30.828,40.978 31.42,40.386 DD1.34@31.42,36.214
USART3_RX: DD1.22 XP4.4 | length 17.6
  Top Layer w0.25: XP4.4 19.084,31.276 19.084,31.246 18.935,31.097 18.935,30.371 19.084,30.222 19.084,29.329 19.233,29.18 24.608,29.18 24.892,29.464 24.892,31.478 24.35,32.02 23.638,32.02 v2(22.86,31.242)
  Bottom Layer w0.25: v2(22.86,31.242) 22.86,31.995 23.622,32.757 23.622,32.76 23.735,32.873 23.735,33.318 23.881,33.464 DD1.22@25.17,33.464
USART3_TX: DD1.21 XP4.2 | length 8.5
  Top Layer w0.25: XP4.2 20.506,30.04 20.536,30.04 20.719,29.857 23.761,29.857 24.07,30.166 v2(24.07,31.343)
  Bottom Layer w0.25: v2(24.07,31.343) 24.07,31.438 24.235,31.603 24.235,32.818 24.381,32.964 DD1.21@25.17,32.964
VCC: R1.1 R2.2 R3.2 VD1.1 XP2.1 | length 22.7
  Top Layer w1: R3.2 R2.2 21.59,2.794 22.86,1.524 XP2.1
  Bottom Layer w1: R1.1 R3.2 21.717,11.303 21.717,14.097 VD1.1
VCC_ADC_MCU: C1.2 DD1.10 R1.2 R6.2 R9.2 | length 24.3
  Bottom Layer w0.25: R1.2 R6.2 R9.2 C1.2 15.494,23.219 15.667,23.392 24.497,23.392 24.727,23.622 27.259,23.622 27.573,23.936 27.573,24.402 27.92,24.749 DD1.10@27.92,27.214
VCC_R: C5.2 R14.1 R21.2 R24.2 VD1.2 VD2.2 VT1.2 | length 40.2
  Top Layer w0.5: C5.2@21.38,22.054 C5.2
  Top Layer w1: VT1.2 14.654,29.21 15.24,28.624 15.24,24.716 15.826,24.13 21.082,24.13 21.59,23.622 C5.2
  Bottom Layer w0.25: VD2.2@26.797,20.701 VD2.2
  Bottom Layer w0.5: VT1.2 3.306,28.952 5.592,28.952 R14.1 ; C5.2 21.59,19.558 VD1.2 23.876,19.304 24.384,18.796 R24.2 R21.2 26.162,19.812 VD2.2
pads on no net: DD1.1 DD1.4 DD1.5 DD1.6 DD1.17 DD1.18 DD1.19 DD1.20 DD1.28 DD1.29 DD1.30 DD1.31 DD1.32 DD1.33 DD1.38 DD1.39 DD1.40 DD1.45 DD1.46

## Polygon pours and split planes (outlines as drawn)
Gnd on Top Layer "GND_L01_P000" (solid, pour order 0): 0.254,44.704 0.254,15.494 54.864,15.494 54.864,25.908 45.72,25.908 45.72,44.704
3V3 on Bottom Layer "3V3_L02_P001" (solid, pour order 1): 0.254,44.704 0.254,33.528 8.636,33.528 8.636,44.704

## Silkscreen, mask and mechanical layers (free items; w line width, h text height)
Top Overlay:
  text "Lema & Kripaks" at 28.61,29.459 h1
  text "BDU v1 main board" at 28.61,28.062 h1
  text "(2023.07.05)" at 28.61,26.792 h1
Mechanical 1:
  lines w0.2: 46,26.25 46,45 0,45 0,0 55,0 55,26.25 ; 46.008,26.25 55.008,26.25
  lines w3: 0,14.478 12.446,14.478 13.97,12.954 13.97,5.08

## Text inside footprints (layer, text, board x,y; h text height)
XP1: Top Overlay "2" at 9.906,1.016 h1; Top Overlay "1" at 3.048,1.016 h1
XP2: Top Overlay "1" at 26.67,1.016 h1; Top Overlay "10" at 53.34,1.016 h1